# Altium PCB GeckoBreakout.PcbDoc
Units mil, origin at the board's own origin, x right, y up, seen from the top; angles counter-clockwise.
Board outline 1500 x 700 mil, 2 copper layers (Top Layer, Bottom Layer); 4 components, 6 nets, 20 pads, 0 vias.
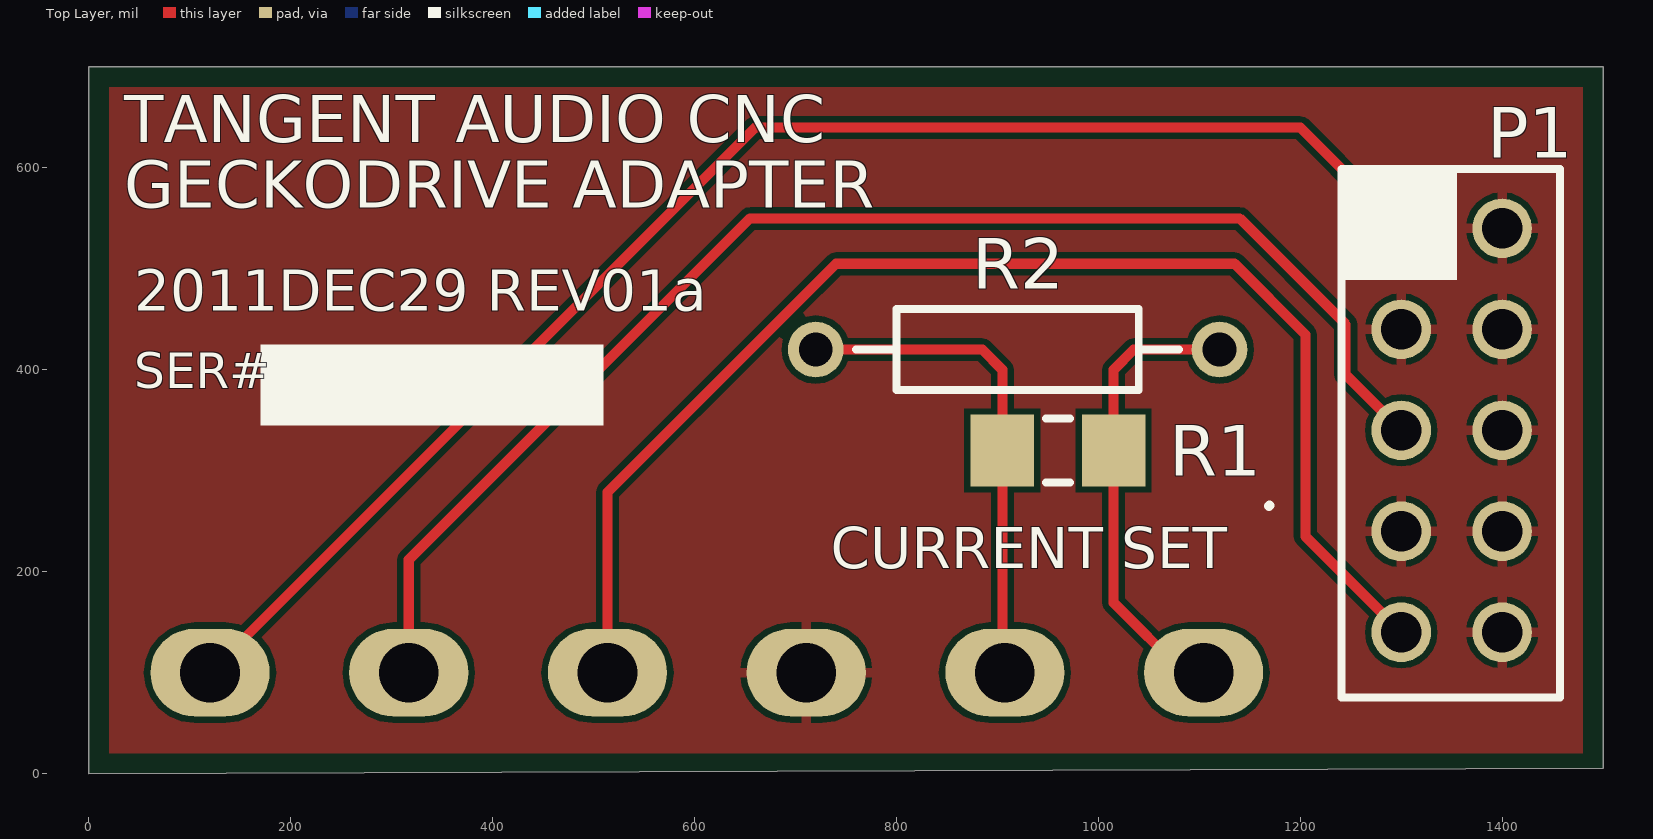
[diagram p0: Top Layer view]
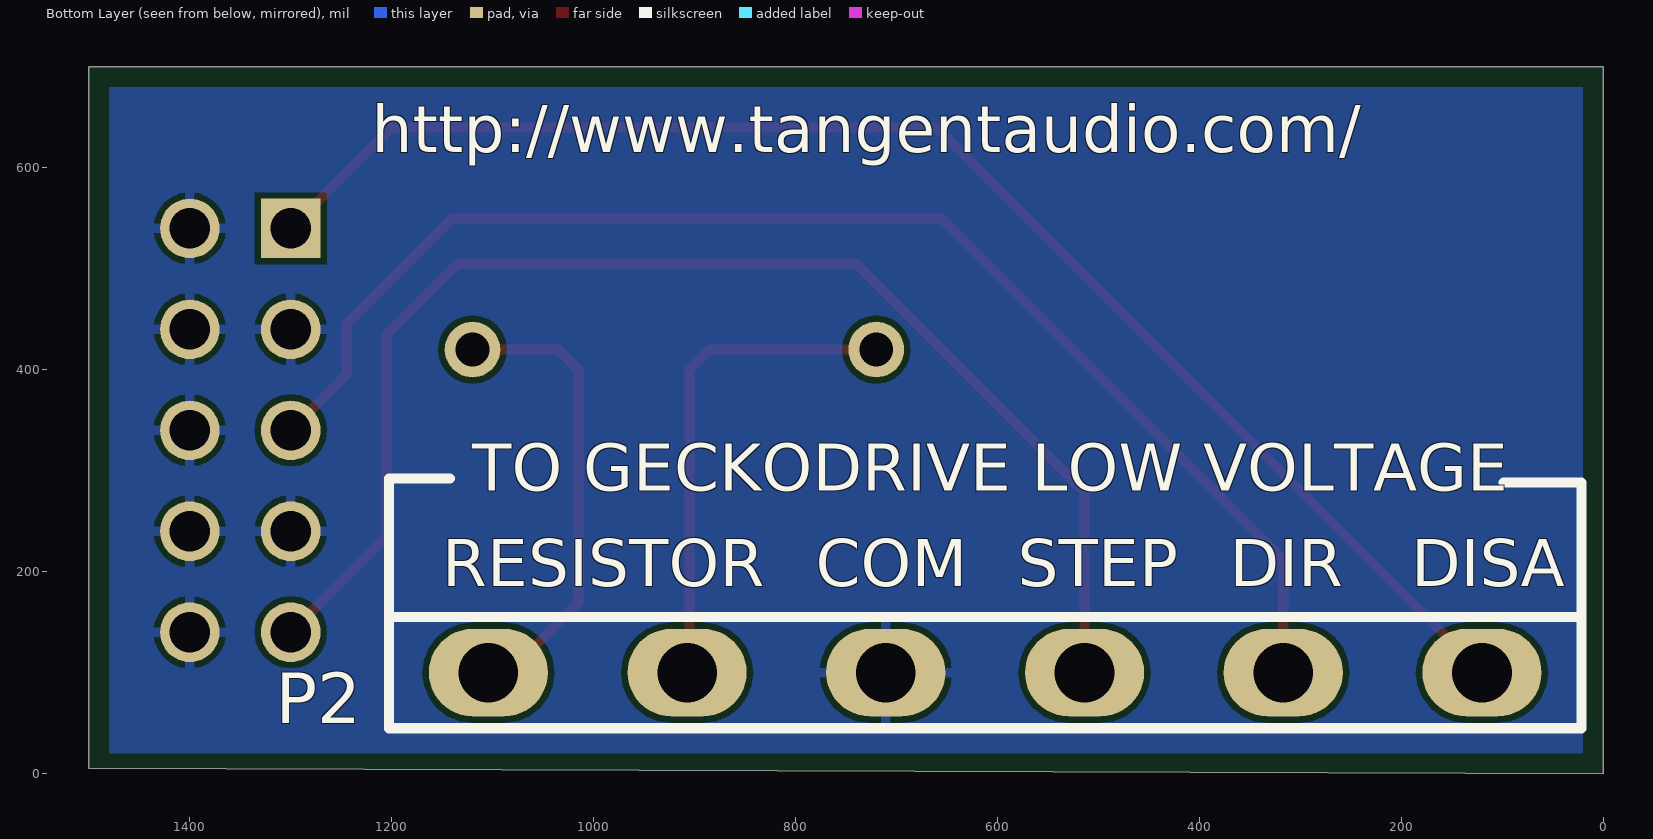
[diagram p1: Bottom Layer view, seen from below]

## Layer stack, top to bottom
Top Layer: signal copper 1.4
Dielectric: dielectric 12.6, FR-4, Dk 4.8
Bottom Layer: signal copper 1.4

## Board outline
0,0 1500,5 1500,700 0,700

## Design rules (kind name [scope] priority, off if disabled: settings)
Clearance [All] p1: gap=6
ComponentClearance [All] p1: gap=10 collisioncheckmode=3 verticalgap=10
MinimumAnnularRing [All] p1: minimumring=7
PolygonConnect [All] p1: connectstyle=Relief reliefconductorwidth=10 reliefentries=4 polygonreliefangle="90 Angle"
RoutingVias [All] p1: holewidth=28 width=50 viastyle="Through Hole" minholewidth=28 minwidth=50 maxholewidth=28 maxwidth=50
SolderMaskExpansion [All] p1: expansion=4
TestPointUsage [All] p1: valid=0 allowmultiple=FALSE
Testpoint [All] p1: side=15 testpointundercomponent=TRUE minsize=40 maxsize=100 preferedsize=60 minholesize=0 maxholesize=40 preferedholesize=32 testpointgrid=1 style=1023 order=0-112345678
Width [All] p1: maxlimit=20 minlimit=6 preferedwidth=10 minimp=50.000000 maximp=50.000000 favimp=50.000000
18 further rules are at their usual default settings.

## Components (designator, comment, footprint, x,y, rotation, side; value= is the part's Value field where it differs from the comment)
P1 "Header 5X2" "BETTER HDR2X5" 1300,540 r270 top
P2 "Phoenix_1933228" Phoenix_1933228 120,100 r0 bottom
R1 "Res3" 3216[1206] 960,320 r180 top
R2 "Res1" AXIAL-0.4 920,420 r180 top

## Footprints (in the part's own frame and the unit in brackets; to place one, negate y for a bottom-side part, rotate by r counter-clockwise, add the part's x,y. Pads: shape width x height; smd on the part's side, far side on the other; paste and mask are expansions set on the pad)
3216[1206] [mm] "Chip Resistor; Body 3.2 x 1.6 mm (LxW typ)"
  rect 1.6x1.8 smd: 1(-1.4,0) 2(1.4,0)
  silkscreen extent -0.3,-0.8 0.3,0.8
AXIAL-0.4 [mm] "Resistor; 2 Leads"
  round 1.4 hole 0.85: 1(-5.08,0) 2(5.08,0)
  silkscreen extent -4.06,-1.02 4.06,1.02
"BETTER HDR2X5" [mm] "Connector; Header; 5x2 Position"
  rect 1.5x1.5 hole 1.016: 1(0,0)
  round 1.5 hole 1.016: 2(0,2.54) 3(2.54,0) 4(2.54,2.54) 5(5.08,0) 6(5.08,2.54) 7(7.62,0) 8(7.62,2.54) 9(10.16,0) 10(10.16,2.54)
  silkscreen extent -1.5,-1.5 11.8,4
Phoenix_1933228 [mm] "Phoenix Contact 5mm Pin Header"
  oval 3x2.2 hole 1.5: 1(0,0) 2(5,0) 3(10,0) 4(15,0) 5(20,0) 6(25,0)
  silkscreen extent -2.5,-1.4 27.5,1.4

## Part data
P1: "Header, 5-Pin, Dual row"
R1 R2: "Resistor"

## Nets (pads, with @x,y where several pads share a name; then routed paths per layer and width w, separated by ;. In a path a pad name is that pad's centre, name@x,y a point inside that pad or via, vN(x,y) a via of type N, cw(c..) or ccw(c..) an arc to the next point about the centre after c; other vN are vias at no path point)
COMMON: P1.2 P1.3 P1.4 P1.6 P1.7 P1.8 P1.10 P2.4
DIR: P1.5 P2.2 | length 1351.3
  Top Layer w10: P2.2 316.85,211.85 655,550 1140,550 1245,445 1245,395 P1.5
DISABLE: P1.1 P2.1 | length 1445.1
  Top Layer w10: P2.1 660,640 1200,640 P1.1
NetP2_5: P2.5 R1.2 R2.2 | length 500.5
  Top Layer w10: R2.2 885,420 904.88,400.12 904.88,117.48 P2.5@887.4,100
NetP2_6: P2.6 R1.1 R2.1 | length 431.9
  Top Layer w10: P2.6@1084.25,100 1015.12,169.13 1015.12,400.12 1035,420 R2.1@1110,420
STEP: P1.9 P2.3 | length 1327.1
  Top Layer w10: P2.3 513.7,278.7 740,505 1135,505 1205,435 1205,235 P1.9

## Polygon pours and split planes (outlines as drawn)
COMMON on Top Layer "Bottom Layer-No Net" (solid, remove dead copper, pour order 1000): 20,20 1480,20 1480,680 20,680 20,20
COMMON on Bottom Layer "Bottom Layer-No Net" (solid, remove dead copper, pour order 1001): 20,20 20,680 1480,680 1480,20 20,20

## Silkscreen, mask and mechanical layers (free items; w line width, h text height)
Top Overlay:
  rectangle: 170,345 510,425
  lines w10: 1168.97,265 1169.49,265.51
  text "TANGENT AUDIO CNC" at 35,610 h80
  text "GECKODRIVE ADAPTER" at 35,545 h80
  text "2011DEC29 REV01a" at 45,445 h70
  text "SER#" at 45,370 h60
  text "CURRENT SET" at 735,190 h70
Bottom Overlay:
  lines w10: 21.57,155.12 21.57,288.43 98.43,288.43 ; 1142.32,292.32 1202.68,292.32 1202.68,155.12
  text "http://www.tangentaudio.com/" at 1220,600 h80
  text "TO GECKODRIVE LOW VOLTAGE" at 1120,265 h80
  text "DISA" at 190,170 h80
  text "DIR" at 370,170 h80
  text "STEP" at 580,170 h80
  text "COM" at 780,170 h80
  text "RESISTOR" at 1150,170 h80
Mechanical 1:
  lines w10: 0,10 0,700 1495,700 1495,5 5,5